# EAGLE board connector (EAGLE 6.2)
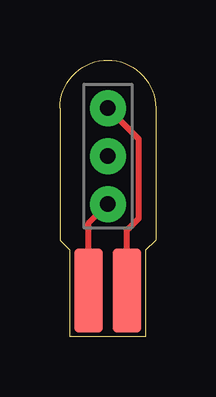
[diagram p0: board, top side]
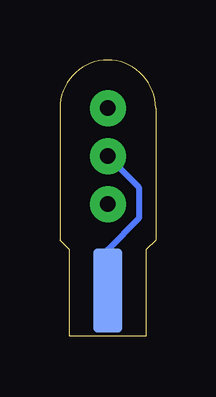
[diagram p1: board, bottom side, seen from below]

Size 4 x 11.5 mm. Coordinates in mm from the lower left corner, seen from the top.
Outline: 0,4 0.4,3.6 0.4,0 3.6,0 3.6,3.6 4,4 4,9.5 arc90 2,11.5 arc90 0,9.5 0,4
Copper layers (1*16): Top 0.035mm / dielectric 1.5mm / Bottom 0.035mm
Design rules: minimum track width 10mil, minimum drill 24mil, track to track 8mil, track to pad 8mil, pad to pad 8mil, via to via 8mil, smd to smd 8mil, copper to edge 40mil, drill to drill 8mil, minimum pad ring 10mil, minimum via ring 8mil, stop-mask expansion 4mil, vias tented up to drill 0mil, thermal gap 10mil

## Footprints (pad centres in the part's own frame; a part is rotated, then mirrored left to right if it is on the bottom)
CONNECTOR_PAD = drill 0.65 pad 1.5: P$1 0,0; P$2 0,2; P$3 0,4
HEADER_PAD = smd 1.2 x 3.5: P$1 0,0

## Placement (x,y rotation side)
E$1  [CONNECTOR_PAD]  2,9.5 180 top
E$2  [HEADER_PAD]  2.8,1.9 0 top
E$4  [HEADER_PAD]  1.2,1.9 0 top
E$5  [HEADER_PAD]  2,1.9 0 bottom

## Library data of the parts
E$1 E$2 E$4 E$5 = appessory

## Nets
S$2: E$1.P$2 E$5.P$1
S$3: E$1.P$3 E$4.P$1
S$4: E$1.P$1 E$2.P$1

## Tracks (layer width: path | path; a pad name or v marks a point on that pad's centre or on a via)
S$2
  Bottom 0.254: E$1.P$2 0.7,6.2 0.7,4.9 2,3.6 E$5.P$1
S$3
  Top 0.254: E$4.P$1 1.2,4.7 E$1.P$3
S$4
  Top 0.254: E$1.P$1 3.3,8.2 3.3,4.9 2.8,4.4 E$2.P$1